# EAGLE board stepper-motor-driver (EAGLE 5.01)
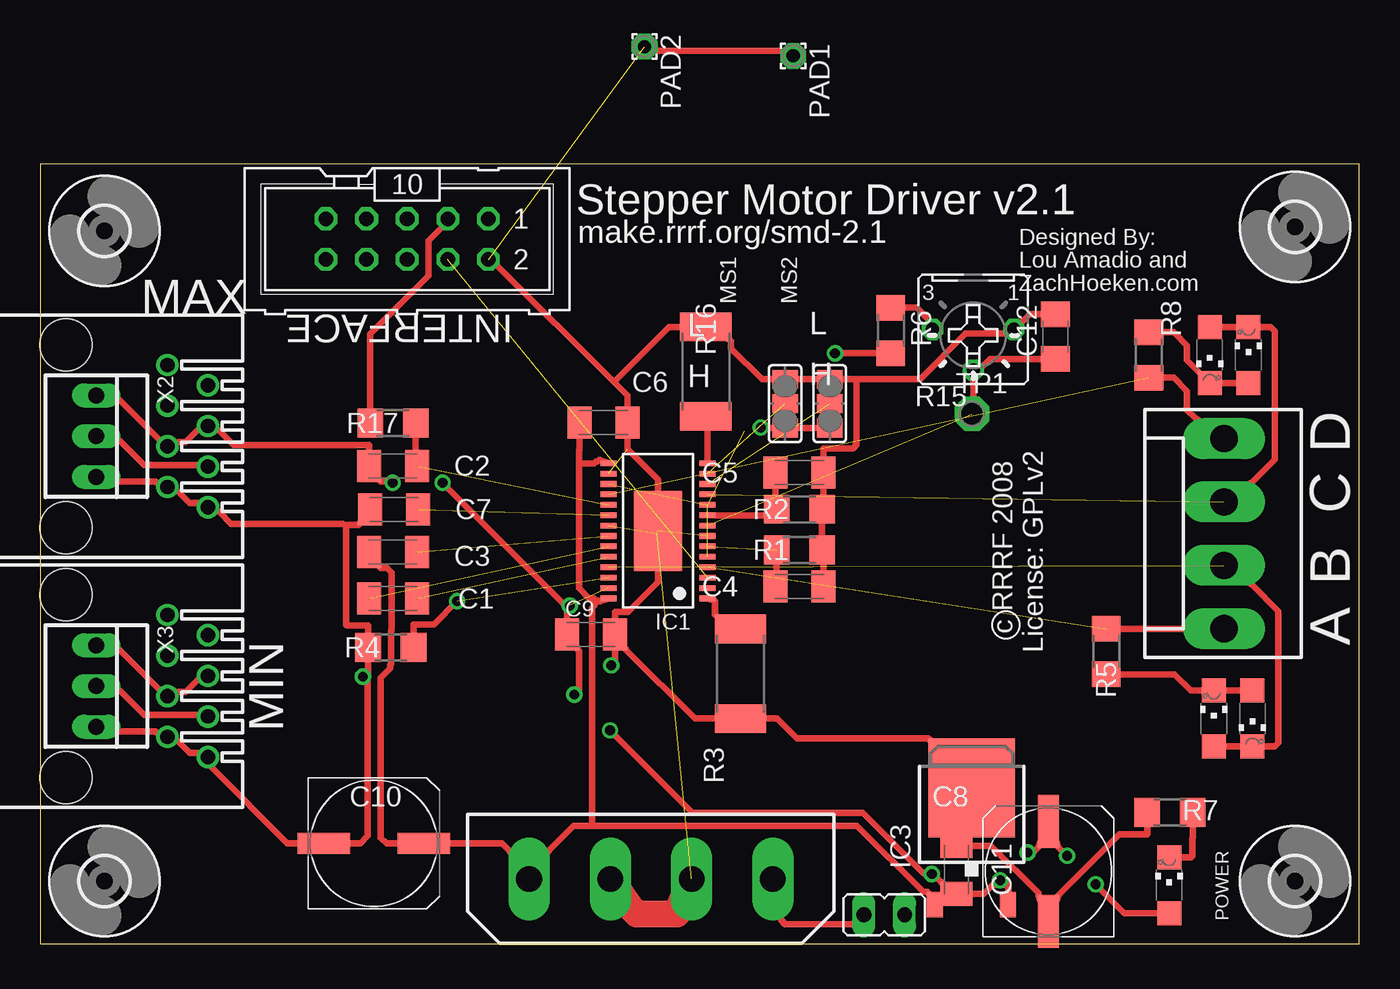
[diagram p0: board, top side]
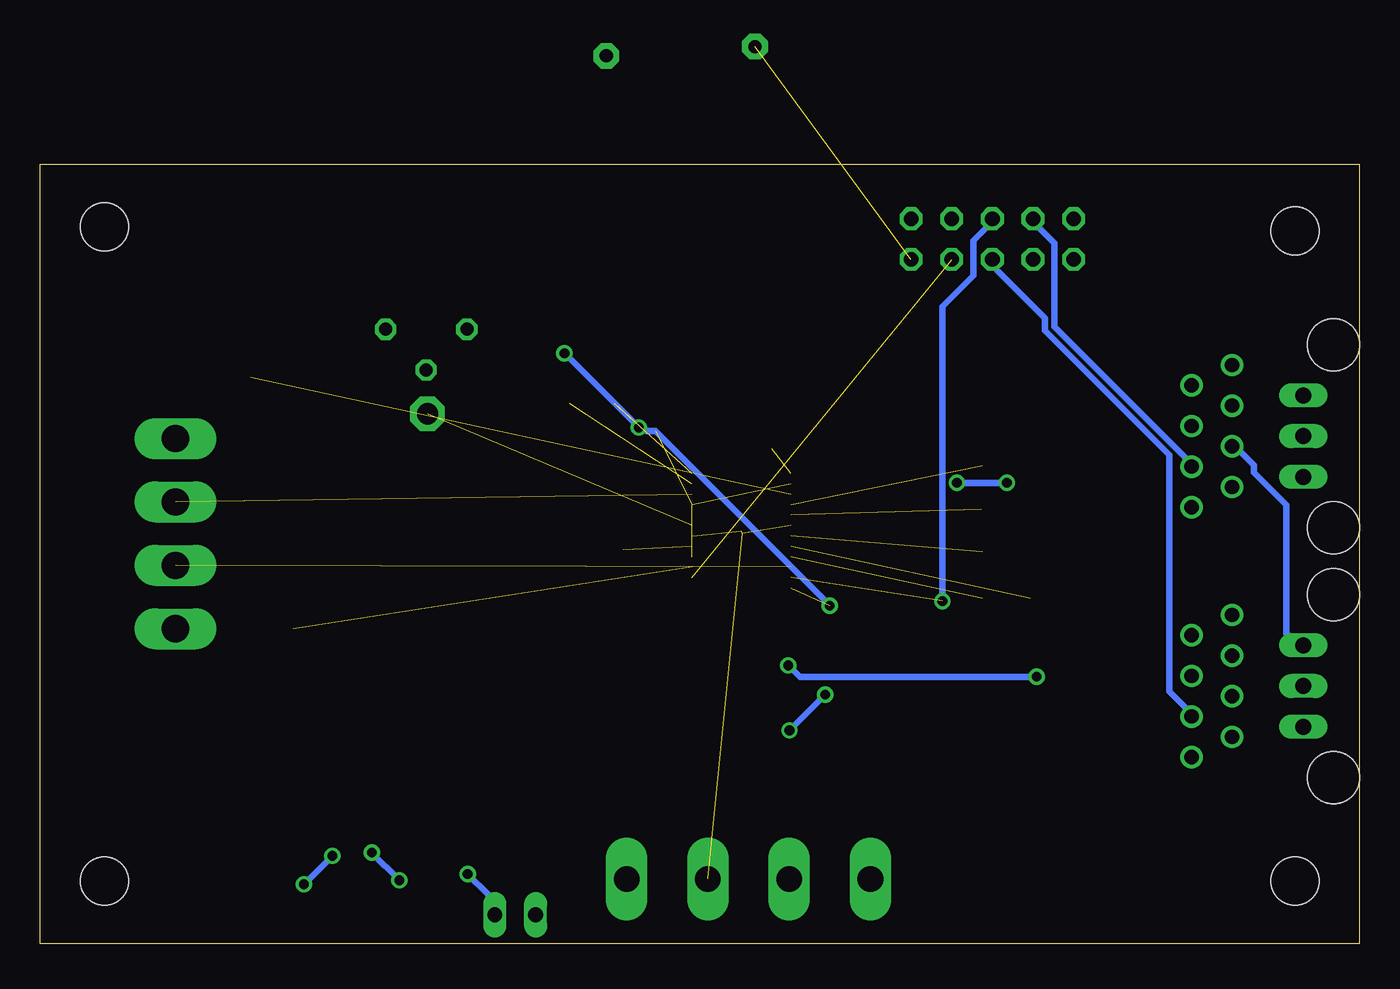
[diagram p1: board, bottom side, seen from below]

Size 82.47 x 48.76 mm. Coordinates in mm from the lower left corner, seen from the top.
Outline: 0,0 82.47,0 82.47,48.76 0,48.76 0,0
Copper layers (1*16): Top 0.035mm / dielectric 1.5mm / Bottom 0.035mm
Design rules "default": minimum track width 10mil, minimum drill 24mil, track to track 8mil, track to pad 8mil, pad to pad 8mil, via to via 8mil, smd to smd 8mil, copper to edge 40mil, drill to drill 8mil, minimum pad ring 10mil, minimum via ring 8mil, stop-mask expansion 4mil, vias tented up to drill 0mil, thermal gap 10mil
Net classes: 0 default: width 0.406 mm; 1 Power: width 0.406 mm, clearance 0.406 mm; 2 Trunk: width 1.676 mm, clearance 0.508 mm

## Footprints (pad centres in the part's own frame; a part is rotated, then mirrored left to right if it is on the bottom)
C1206K = smd 1.5 x 2: 1 -1.5,0; 2 1.5,0
UD-8X10_NICHICON = smd 3.3 x 1.3: + 3.125,0; - -3.125,0
C1206 = smd 1.6 x 1.8: 1 -1.4,0; 2 1.4,0
TSSOP28 = smd 0.35 x 1: 1 -4.225,-3.087; 2 -3.575,-3.087; 3 -2.925,-3.087; 4 -2.275,-3.087; 5 -1.625,-3.087; 6 -0.975,-3.087; 7 -0.325,-3.087; 8 0.325,-3.087; 9 0.975,-3.087; 10 1.625,-3.087; 11 2.275,-3.087; 12 2.925,-3.087; 13 3.575,-3.087; 14 4.225,-3.087; 15 4.225,3.087; 16 3.575,3.087; 17 2.925,3.087; 18 2.275,3.087; 19 1.625,3.087; 20 0.975,3.087; 21 0.325,3.087; 22 -0.325,3.087; 23 -0.975,3.087; 24 -1.625,3.087; 25 -2.275,3.087; 26 -2.925,3.087; 27 -3.575,3.087; 28 -4.225,3.087 | smd 5 x 3: EXP 0,0
TO252 = smd 1 x 1.6: 1 -2.28,-4.8; 2 2.28,-4.8 | smd 5.4 x 6.2: 3 0,2.5
520426-4 = drill 0.889 round: 1 -4.445,6.35; 2 -3.175,8.89; 3 -1.905,6.35; 4 -0.635,8.89; 5 0.635,6.35; 6 1.905,8.89; 7 3.175,6.35; 8 4.445,8.89 | hole 3.251: -5.715,0; 5.715,0
JP1 = drill 0.914 long: 1 0,-1.27; 2 0,1.27
CHIPLED_1206 = smd 1.5 x 1.5: A 0,-1.75; C 0,1.75
1,6/0,8 = drill 0.813 pad 1.6 octagon: 1 0,0
9090-4V = drill 1.6 pad 2.6 long: 1 -7.62,0; 2 -2.54,0; 3 2.54,0; 4 7.62,0
R1206 = smd 1.6 x 1.803: 1 -1.422,0; 2 1.422,0
R2512 = smd 1.8 x 3.2: 1 -2.8,0; 2 2.8,0
B25P = drill 0.813 octagon: A -2.54,0; E 2.54,0; S 0,2.54
SJ_2 = smd 1.168 x 1.6: 1 -1.524,0; 2 0,0; 3 1.524,0
ML10 = drill 0.914 octagon: 1 -5.08,-1.27; 2 -5.08,1.27; 3 -2.54,-1.27; 4 -2.54,1.27; 5 0,-1.27; 6 0,1.27; 7 2.54,-1.27; 8 2.54,1.27; 9 5.08,-1.27; 10 5.08,1.27
P1-13 = drill 1.321 pad 2.159 octagon: 1 0,0
3,0 = hole 3: 0,0
GND-JUNCTION = smd 2.54 x 1.27: P$1 0,0 | smd 1.27 x 2.54: P$2 0,0 | smd 2.54 x 1.27 rotated 45: P$3 0,0
KK-156-4 = drill 1.7 pad 2.184 long: 1 -5.94,0; 2 -1.98,0; 3 1.98,0; 4 5.94,0
22-23-2031 = drill 1 long: 1 -2.54,0; 2 0,0; 3 2.54,0

## Placement (x,y rotation side)
C1  .22uF  [C1206K]  22.06,21.59 0 top
C2  1nF  [C1206K]  22.06,29.89 0 top
C3  .22uF  [C1206K]  22.06,24.51 180 top
C4  680pF  [C1206K]  47.46,22.35 0 top
C5  680pF  [C1206K]  47.46,29.46 0 top
C6  100nF  [C1206K]  35.22,32.58 0 top
C7  .22uF  [C1206K]  22.14,27.17 180 top
C8  100nF  [C1206K]  57.29,4.64 90 top
C9  100nF  [C1206K]  34.43,19.35 0 top
C10  100uF  [UD-8X10_NICHICON]  20.87,6.29 0 top
C11  100uF  [UD-8X10_NICHICON]  63.03,4.54 90 top
C12  [C1206]  63.46,37.97 90 top
IC1  A3979  [TSSOP28]  38.62,25.83 90 top
IC3  7805DT  [TO252]  58.23,7.26 0 top
J1  [520426-4]  1.61,31.74 270 top
J2  [520426-4]  1.61,16.12 270 top
JP1  [JP1]  52.77,1.82 90 top
LED1  [CHIPLED_1206]  70.57,3.68 0 top
LED2  [CHIPLED_1206]  75.78,14.09 180 top
LED3  [CHIPLED_1206]  73.37,14.09 0 top
LED4  [CHIPLED_1206]  75.53,36.82 0 top
LED5  [CHIPLED_1206]  73.11,36.82 180 top
PAD1  [1,6/0,8]  47.08,55.52 270 top  (outside the outline)
PAD2  [1,6/0,8]  37.78,56.1 270 top  (outside the outline)
POWER  9090-4V  [9090-4V]  38.19,4.06 180 top
R1  22K  [R1206]  47.46,24.63 180 top
R2  22K  [R1206]  47.46,27.17 180 top
R3  0.75  [R2512]  43.78,16.89 270 top
R4  22K  [R1206]  21.93,18.54 0 top
R5  1K  [R1206]  66.64,18.28 270 top
R6  2.2K  [R1206]  53.18,38.35 270 top
R7  1K  [R1206]  70.62,8.22 0 top
R8  1K  [R1206]  69.3,36.82 90 top
R15  10K  [B25P]  58.33,38.43 180 top
R16  0.75  [R2512]  41.62,35.78 90 top
R17  1K  [R1206]  22.06,32.56 0 top
SJ1  [SJ_2]  46.57,33.78 270 top
SJ2  [SJ_2]  49.37,33.78 270 top
SV1  [ML10]  22.95,44.06 180 top
TP1  TPPAD1-13  [P1-13]  58.26,33.14 0 top
U$1  [3,0]  4.03,44.57 0 top
U$2  [3,0]  78.45,44.83 0 top
U$3  [3,0]  4.03,3.93 0 top
U$4  [3,0]  78.45,3.93 0 top
U$5  GND-JUNCTION  [GND-JUNCTION]  38.57,25.65 0 top
X1  [KK-156-4]  74,25.65 90 top
X2  22-23-2031  [22-23-2031]  3.52,31.74 270 top
X3  22-23-2031  [22-23-2031]  3.52,16.12 270 top

## Library data of the parts
C1-C11 R3 R4 R6-R8 R16 R17 = rcl
C12 R1 R2 R5 = resistor
IC1 IC3 = linear
J1 J2 = con-amp
JP1 SJ1 SJ2 = jumper
LED1-LED5 = led
PAD1 PAD2 = wirepad
POWER = con-thomas-betts
R15 = pot
SV1 = con-harting-ml
TP1 = testpad
U$1-U$4 = holes
U$5 = reprap
X1-X3 = con-molex

## Nets
A [Power]: IC1.4 R5.1 X1.1
B [Power]: IC1.25 LED2.C LED3.A X1.2
C [Power]: IC1.11 LED4.C LED5.A X1.3
D [Power]: IC1.18 R8.1 X1.4
DIR: IC1.3 SV1.4
ENABLE: IC1.26 R4.2 SV1.5
GND [Power]: C4.2 C5.2 C6.2 C7.2 C8.2 C9.2 C10.- C11.- C12.2 IC1.7 IC1.16 IC1.21 IC1.EXP IC3.3 J1.7 J1.8 J2.7 J2.8 PAD1.1 PAD2.1 R1.1 R2.1 R3.2 R4.1 R7.1 R15.A R16.2 SJ1.1 SJ2.1 SV1.2 U$5.P$2 X2.3 X3.3
GND1 [Trunk]: POWER.2 POWER.3 U$5.P$1
MAX: J1.6 SV1.7 X2.2
MIN: J2.6 SV1.6 X3.2
MS1: IC1.13 SJ1.2
MS2: IC1.12 SJ2.2
N$1: C7.1 IC1.20
N$2 [Power]: IC1.14 R16.1
N$3 [Power]: IC1.1 R3.1
N$4 [Power]: C3.1 IC1.22
N$5: C1.1 IC1.23
N$6: C1.2 IC1.24
N$7: C4.1 IC1.6 R1.2
N$8: LED1.C R7.2
N$9: R6.1 R15.E
N$10: LED2.A LED3.C R5.2
N$11: C5.1 IC1.9 R2.2
N$12 [Power]: LED4.A LED5.C R8.2
N$13: C12.1 IC1.8 R15.S TP1.1
N$14: C2.2 IC1.19 R17.2
STEP: R17.1 SV1.3
VC+ [Power]: C3.2 C6.1 C10.+ IC1.15 IC1.28 IC3.1 POWER.4
VCC: C2.1 C8.1 C9.1 C11.+ IC1.5 IC1.10 IC1.17 IC1.27 IC3.2 J1.4 J1.5 J2.4 J2.5 JP1.1 LED1.A R6.2 SJ1.3 SJ2.3 X2.1 X3.1
VCC-IN: JP1.2 POWER.1

## Tracks (layer width: path | path; a pad name or v marks a point on that pad's centre or on a via)
A  (1 unrouted)
  Top 0.406: R5.1 67.53,19.7 71.46,19.7 X1.1
B  (1 unrouted)
  Top 0.406: LED3.A 74.1,12.34 75.04,12.34 LED2.C 76.52,12.34 77.18,12.34 77.41,12.57 77.41,20.8 75.81,22.4 X1.2
C  (1 unrouted)
  Top 0.406: LED5.A 73.85,38.58 74.79,38.58 LED4.C 76.26,38.58 76.92,38.58 77.18,38.32 77.18,30.27 75.81,28.9 X1.3
D  (1 unrouted)
  Top 0.406: R8.1 70.19,35.4 70.85,35.4 71.69,34.56 71.69,33.37 72.2,32.86 X1.4
DIR  (1 unrouted)
ENABLE  (via drill 0.61)  (1 unrouted)
  Top 0.406: v26.07,21.43 24.62,19.98 23.36,19.98 23.36,19.43 R4.2
  Bottom 0.406: v26.07,21.43 26.07,39.85 24.14,41.78 24.14,43.96 23.36,44.75 SV1.5
GND  (via drill 0.61)  (5 unrouted)
  Top 0.406: X3.3 5.02,13.28 7.23,13.28 7.28,13.23 J2.7 8.65,12.67 9.36,11.96 9.82,11.96 J2.8 10.76,10.99 15.46,6.29 C10.- 20.03,6.29 20.48,6.75 20.48,16.71 | 19.14,26.16 19.14,19.93 19.16,19.91 20.51,19.91 20.51,19.43 R4.1 20.51,17.65 20.51,16.94 20.48,16.91 20.48,16.71 | 19.14,26.16 19.16,26.18 19.9,26.18 C7.2 | X2.3 5.02,28.9 7.23,28.9 7.28,28.85 J1.7 8.65,28.29 9.36,27.58 9.82,27.58 J1.8 11.19,27.02 11.95,26.26 18.96,26.26 19.14,26.16 | C4.2 48.96,23.34 48.96,23.74 R1.1 48.88,25.52 48.88,26.28 R2.1 48.96,28.06 48.96,28.47 C5.2 48.96,30.45 48.96,30.98 50.81,30.98 51.04,31.21 51.04,35.33 | C12.2 62.57,39.36 61.86,39.36 61.35,38.86 R15.A 60.24,38.15 57.85,38.15 55.03,35.33 51.04,35.33 | 51.04,35.33 50.89,35.33 50.86,35.3 SJ2.1 SJ1.1 45.12,35.3 43.19,37.23 43.19,37.69 R16.2 40.04,38.58 39.31,38.58 35.87,35.14 | R7.1 69.2,7.34 69.2,6.85 67.47,6.85 63.66,3.04 C11.- 62.4,3.04 62.4,3.2 59.45,6.14 58.28,6.14 C8.2 57.29,6.67 IC3.3 55.54,12.85 47.31,12.85 46.06,14.09 45.35,14.09 R3.2 42.2,14.09 40.93,14.09 36.66,18.36 C9.2 | C9.2 35.93,20.34 35.93,20.75 36.74,20.75 38.62,22.63 IC1.EXP 38.62,29.03 36.72,30.93 36.72,31.59 C6.2 36.72,33.57 36.72,34.28 35.87,35.14 | 35.87,35.14 28.61,42.39 SV1.2 | v35.7,17.42 35.93,17.65 35.93,18.36 C9.2 | 20.48,16.71 v20.18,16.71 | PAD2.1 38.57,55.85 46.29,55.85 PAD1.1
  Bottom 0.406: v20.18,16.71 34.99,16.71 v35.7,17.42
GND1  (1 unrouted)
  Top 1.676: POWER.3 36.94,2.23 37.3,1.88 39.79,1.88 POWER.2
MAX
  Top 0.406: J1.6 9.82,29.94 6.52,29.94 5.02,31.44 X2.2
  Bottom 0.406: SV1.7 20,44.75 19.06,43.81 19.06,38.6 10.88,30.42 J1.6
MIN
  Top 0.406: J2.6 9.82,14.32 6.52,14.32 5.02,15.82 X3.2
  Bottom 0.406: SV1.6 22.64,42.11 19.67,39.14 19.67,38.35 11.88,30.55 11.88,15.79 10.88,14.8 J2.6
MS1  (1 unrouted)
MS2  (1 unrouted)
N$1  (1 unrouted)
N$2
  Top 0.406: IC1.14 41.72,30.22 41.72,32.1 R16.1
N$3
  Top 0.406: IC1.1 42.2,21.43 42.2,20.57 R3.1
N$4  (1 unrouted)
N$5  (1 unrouted)
N$6  (1 unrouted)
N$7  (1 unrouted)
  Top 0.406: R1.2 46.04,23.74 46.04,23.34 C4.1
N$8
  Top 0.406: LED1.C 71.31,5.43 71.97,5.43 72.02,5.48 72.02,6.6 72.05,6.62 72.05,7.34 R7.2
N$9
  Top 0.406: R6.1 54.06,39.77 54.8,39.77 55.51,39.06 R15.E
N$10
  Top 0.406: LED2.A 75.04,15.85 74.1,15.85 LED3.C 72.63,15.85 71.92,15.85 70.9,16.86 67.53,16.86 R5.2
N$11
  Top 0.406: IC1.9 42.2,26.79 45.25,26.79 R2.2 45.96,28.06 45.96,28.47 C5.1
N$12
  Top 0.406: LED4.A 74.79,35.07 73.85,35.07 LED5.C 72.38,35.81 71.69,36.49 71.69,37.41 70.85,38.25 70.19,38.25 R8.2
N$13  (1 unrouted)
  Top 0.406: C12.1 62.57,36.57 59.37,36.57 58.97,36.16 R15.S 58.33,34.21 TP1.1
N$14  (1 unrouted)
  Top 0.406: R17.2 23.48,31.67 23.48,30.88 C2.2
STEP
  Top 0.406: R17.1 20.64,33.45 20.64,38.12 24.3,41.78 24.3,43.96 25.08,44.75 SV1.3
VC+
  Top 0.406: C3.2 21.3,23.52 21.7,23.52 21.98,23.24 21.98,19.66 21.96,19.63 21.96,19.6 21.93,19.58 21.93,17.5 21.91,17.47 21.91,17.45 21.88,17.42 21.88,17.22 21.3,16.63 21.3,6.65 21.65,6.29 C10.+ 28.87,6.29 29.27,5.89 POWER.4 31.86,5.89 33.36,7.39 34.51,7.39 | 34.76,21.48 34.86,21.48 34.94,21.41 35.01,21.41 35.04,21.43 IC1.28 | 34.76,21.48 34.63,21.61 34.33,21.61 33.69,22.24 33.69,30.04 | 33.69,30.04 33.69,30.86 33.72,30.88 33.72,31.59 C6.1 | IC1.15 35.04,30.22 35.01,30.25 34.94,30.25 34.86,30.17 34.76,30.17 34.63,30.04 33.69,30.04 | 34.51,7.39 51.07,7.39 55.21,3.25 55.46,3.25 IC3.1 | 34.76,21.48 34.66,21.31 34.66,21.15 34.51,21 34.51,7.39
VCC  (via drill 0.61)  (4 unrouted)
  Top 0.406: 60.01,3.7 59.55,3.7 58.99,3.14 58.28,3.14 C8.1 56.3,3.88 55.82,4.36 v55.74,4.36 55.26,4.41 55.21,4.41 51.42,8.2 40.78,8.2 v35.62,13.35 | 60.01,3.7 60.52,3.7 60.52,3.25 IC3.2 | v65.98,3.73 67.78,1.93 69.84,1.93 LED1.A | v64.2,5.51 63.66,6.04 C11.+ 62.4,6.04 62.07,5.71 v61.74,5.71 | 60.01,3.7 v60.01,3.98 | J2.4 9.82,16.48 9.11,15.77 8.65,15.77 J2.5 7.46,15.92 5.02,18.36 X3.1 | SJ2.3 SJ1.3 45.07,32.25 v45.05,32.28 | v49.7,36.93 52.29,36.93 R6.2 | 32.93,21.05 32.93,20.34 C9.1 33.67,18.36 33.69,18.33 33.69,15.9 v33.39,15.59 | v25.16,28.82 32.93,21.05 | v22.04,28.82 21.96,28.9 21.3,28.9 C2.1 20.56,30.88 20.56,31.19 12.1,31.19 11.19,32.1 J1.4 9.82,32.1 9.11,31.39 8.65,31.39 J1.5 7.46,31.54 5.02,33.98 X2.1 | 32.93,21.05 v33.11,21.15
  Bottom 0.406: v55.74,4.36 54.47,3.09 JP1.1 | v64.2,5.51 v65.98,3.73 | v60.01,3.98 v61.74,5.71 | v49.7,36.93 v45.05,32.28 44.56,32.05 44.01,32.05 v33.11,21.15 | v22.04,28.82 v25.16,28.82 | X3.1 4.59,19.4 4.59,27.45 6.59,29.46 6.59,29.94 7.38,30.73 J1.5 | v33.39,15.59 v35.62,13.35
VCC-IN
  Top 0.406: JP1.2 50.81,1.24 46.57,1.24 46.34,1.47 POWER.1

## Text on the board
tPlace: Stepper Motor Driver v2.1 | make.rrrf.org/smd-2.1 | Designed By: | Lou Amadio and | MS1 | MS2 | ZachHoeken.com | MAX | INTERFACE | L | L | H | H | License: GPLv2 | c RRRF 2008 | D | C | B | MIN | A | POWER